# Altium PCB THEIA3000 LIGHTING BOARD V2.PcbDoc (part 1 of 2)
Units mil, origin at the board's own origin, x right, y up, seen from the top; angles counter-clockwise.
Board outline 10669.29 x 4271.65 mil, 2 copper layers (Top Layer, Bottom Layer); 147 components, 96 nets, 386 pads, 52 vias.
Unrouted connection lines stored in the file: 10.
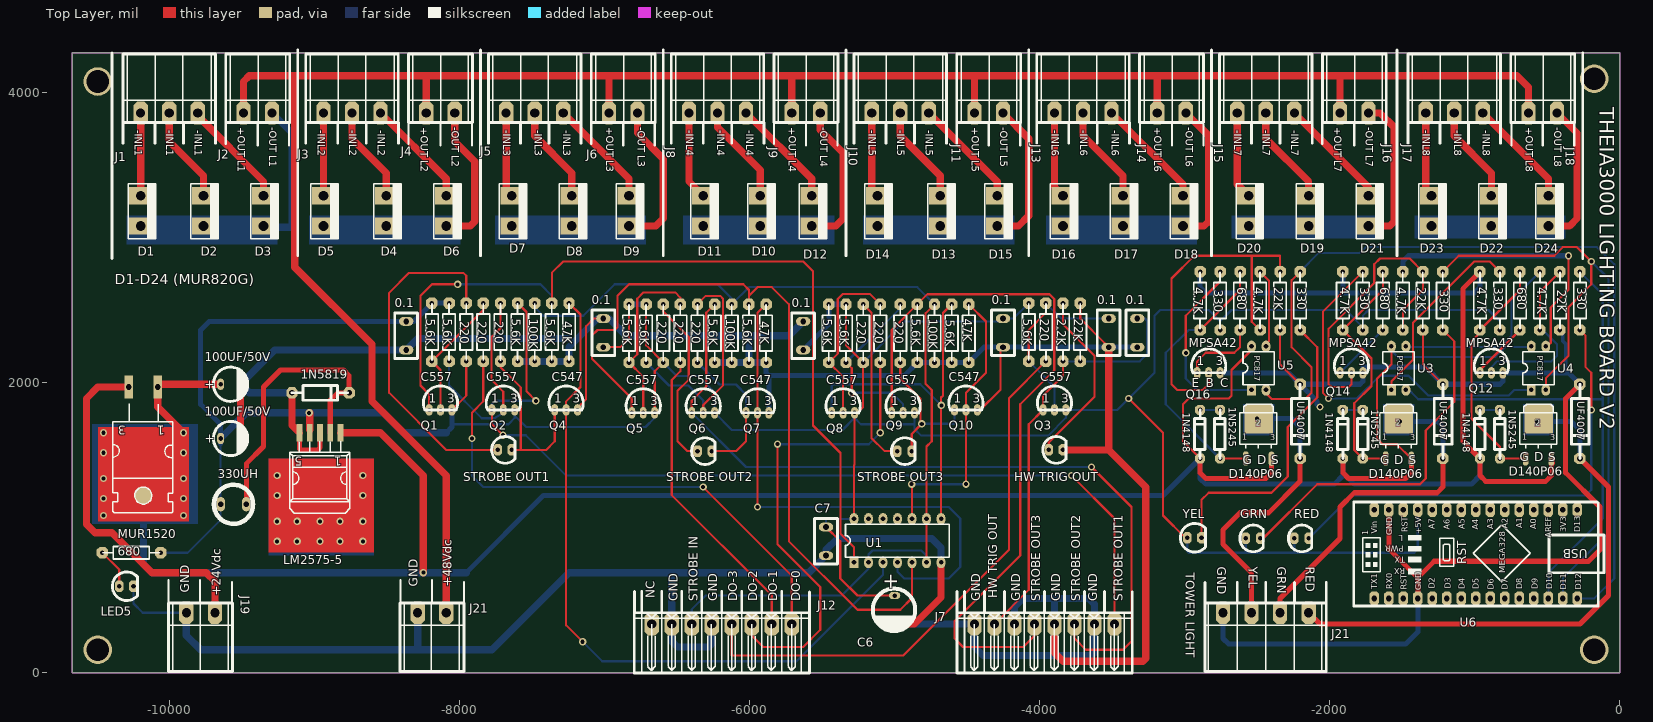
[diagram p0: Top Layer view]
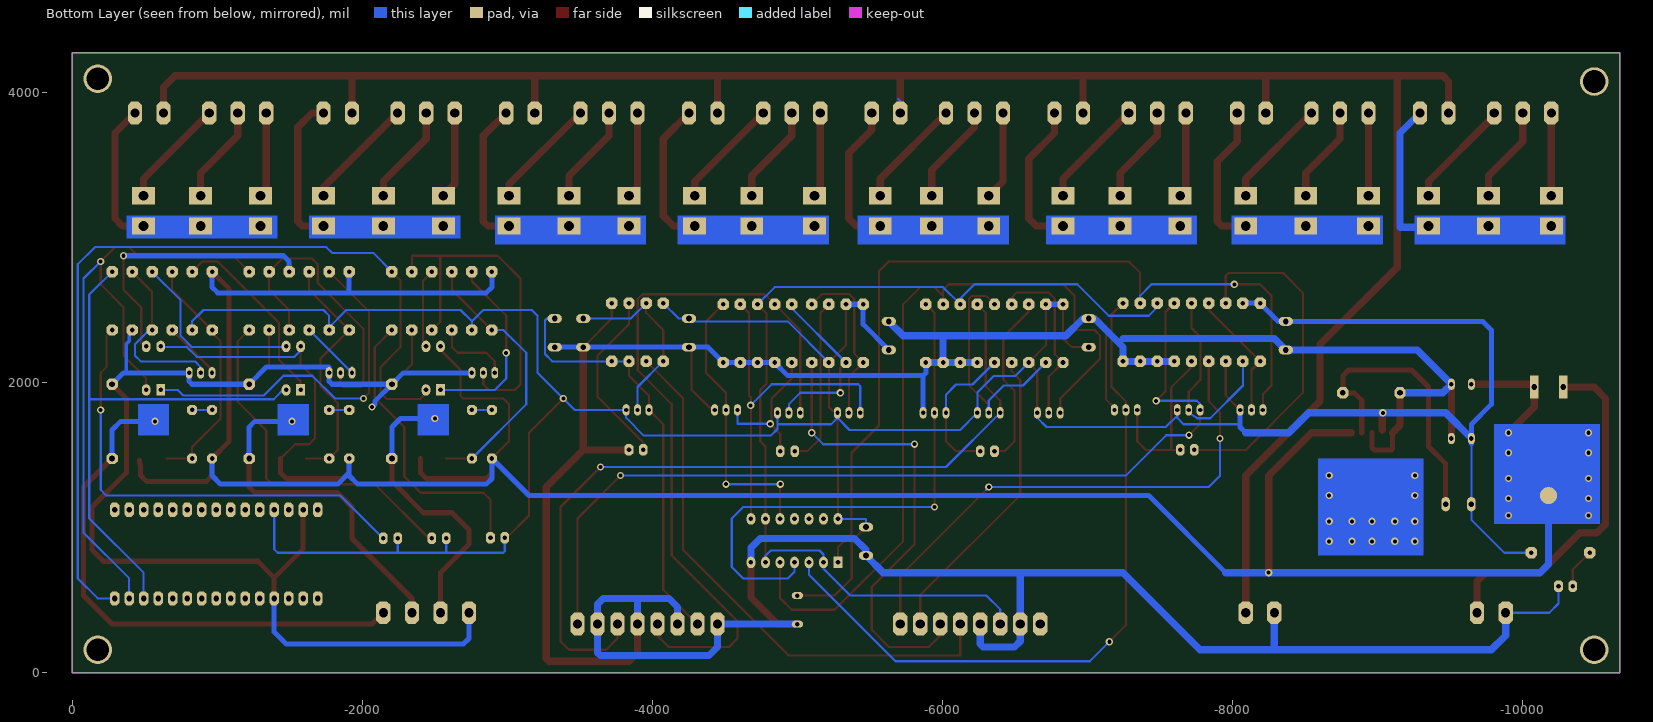
[diagram p1: Bottom Layer view, seen from below]

## Layer stack, top to bottom
Top Solder: solder mask 0.4, Solder Resist, Dk 3.5
Top Layer: signal copper 1.4
Dielectric 1: dielectric 12.6, FR-4, Dk 4.8
Bottom Layer: signal copper 1.4
Bottom Solder: solder mask 0.4, Solder Resist, Dk 3.5

## Board outline
-10669.29,0 -10669.29,4271.65 0,4271.65 0,0

## Design rules (kind name [scope] priority, off if disabled: settings)
Clearance [All] p1: gap=10
PolygonConnect [All] p1: connectstyle=Relief reliefconductorwidth=10 reliefentries=4 polygonreliefangle="90 Angle" airgapwidth=10
RoutingVias [All] p1: holewidth=28 width=50 viastyle="Through Hole" minholewidth=28 minwidth=50 maxholewidth=28 maxwidth=50
SolderMaskExpansion [All] p1: expansion=4
UnpouredPolygon [All] p1: allowunpoured=FALSE
Width [All] p1: maxlimit=70 minlimit=10 preferedwidth=15
29 further rules are at their usual default settings.

## Classes and differential pairs
component class "THIEA3000 LIGHTING BOARD V2-1": 0.1 1N5819 2.2K 5.6K 22K 47K 100K 100UF/50V 220 330UH 680 C1 C2 C3 C4 C5 C6 C7 C8 C9 C10 C557 D1 D2 D3 D4 D5 D6 D7 D8 D9 D10 D11 D12 D13 D14 D15 D16 D17 D18 D19 D20 D21 D22 D23 D24 "HW TRIG OUT" J1 J2 J3 J4 J5 J6 J7 J8 J9 J10 J11 J12 J13 J14 J15 J16 J17 J18 J19 J21 LED5 LM2575-5 MUR1520 Q1 Q2 Q3 Q4 Q5 Q6 Q7 Q8 Q9 Q10 R1 R2 R3 R4 R5 R6 R7 R8 R11 R12 R13 R14 R15 R16 R17 R18 R19 R20 R21 R22 R23 R24 R25 R26 R28 R29 R30 R31 R32 "STROBE OUT1" "STROBE OUT2" "STROBE OUT3" TIP22 U1
component class "THIEA3000 LIGHTING BOARD V2-2": 1N4148 1N5245 4.7K 22K 330 680 D27 D28 D29 D30 D140P06 GRN J21 Q11 Q12 Q13 Q14 Q15 Q16 R33 R34 R36 R37 R38 R39 R40 R41 R42 R44 R45 R46 RED U3 U4 U6 UF4007 YEL ZD1 ZD2

## Components (designator, comment, footprint, x,y, rotation, side; value= is the part's Value field where it differs from the comment)
0.1 "Cap" "CAP 5/8/Re" -8366.14,2224.41 r90 top (schematic designator C1)
0.1 "Cap" "CAP 5/8/Re" -4251.97,2244.09 r90 top (schematic designator C2)
0.1 "Cap" "CAP 5/8/Re" -3523.62,2244.09 r90 top (schematic designator C3)
0.1 "Cap" "CAP 5/8/Re" -3326.77,2244.09 r90 top (schematic designator C4)
0.1 "Cap" "CAP 5/8/Re" -7007.87,2244.09 r90 top (schematic designator C5)
0.1 "Cap" "CAP 5/8/Re" -5629.92,2224.41 r90 top (schematic designator C8)
1N4148 "1N4148" "DIODE 8.5" -964.57,1476.38 r90 top (schematic designator D27)
1N4148 "1N4148" "DIODE 8.5" -1909.45,1476.38 r90 top (schematic designator D29)
1N4148 "1N4148" "DIODE 8.5" -2893.7,1476.38 r90 top (schematic designator D31)
1N5245 "1N5245B (ZD15V)" "DIODE 8.5" -826.77,1476.38 r90 top (schematic designator ZD1)
1N5245 "1N5245B (ZD15V)" "DIODE 8.5" -1771.65,1476.38 r90 top (schematic designator ZD2)
1N5245 "1N5245B (ZD15V)" "DIODE 8.5" -2755.91,1476.38 r90 top (schematic designator ZD3)
1N5819 "1N5819" "DIODE 10.0" -9153.54,1929.13 r0 top (schematic designator D26)
2.2K "2.2K" "RES 1/4" -3838.58,2145.67 r90 top (schematic designator R9)
4.7K "22K" "RES 1/4" -964.57,2362.2 r90 top (schematic designator R33)
4.7K "22K" "RES 1/4" -551.18,2362.2 r90 top (schematic designator R36)
4.7K "22K" "RES 1/4" -1909.45,2362.2 r90 top (schematic designator R39)
4.7K "22K" "RES 1/4" -1496.06,2362.2 r90 top (schematic designator R42)
4.7K "22K" "RES 1/4" -2893.7,2362.2 r90 top (schematic designator R45)
4.7K "22K" "RES 1/4" -2480.31,2362.2 r90 top (schematic designator R48)
5.6K "22K" "RES 1/4" -8188.98,2145.67 r90 top (schematic designator R1)
5.6K "22K" "RES 1/4" -8070.87,2145.67 r90 top (schematic designator R2)
5.6K "22K" "RES 1/4" -7598.43,2145.67 r90 top (schematic designator R8)
5.6K "22K" "RES 1/4" -7362.2,2145.67 r90 top (schematic designator R12)
5.6K "22K" "RES 1/4" -6830.71,2137.8 r90 top (schematic designator R14)
5.6K "22K" "RES 1/4" -6712.64,2137.79 r90 top (schematic designator R15)
5.6K "22K" "RES 1/4" -6240.16,2137.8 r90 top (schematic designator R19)
5.6K "22K" "RES 1/4" -6003.94,2137.8 r90 top (schematic designator R21)
5.6K "22K" "RES 1/4" -5452.76,2137.8 r90 top (schematic designator R23)
5.6K "22K" "RES 1/4" -5334.65,2137.8 r90 top (schematic designator R24)
5.6K "22K" "RES 1/4" -4842.52,2137.8 r90 top (schematic designator R29)
5.6K "22K" "RES 1/4" -4606.3,2137.8 r90 top (schematic designator R31)
5.6K "22K" "RES 1/4" -4074.8,2145.67 r90 top (schematic designator R5)
22K "22K" "RES 1/4" -3720.47,2145.67 r90 top (schematic designator R10)
22K "22K" "RES 1/4" -413.39,2362.2 r90 top (schematic designator R37)
22K "22K" "RES 1/4" -1358.27,2362.2 r90 top (schematic designator R43)
22K "22K" "RES 1/4" -2342.52,2362.2 r90 top (schematic designator R49)
47K "22K" "RES 1/4" -7244.09,2145.67 r90 top (schematic designator R13)
47K "22K" "RES 1/4" -5885.83,2137.8 r90 top (schematic designator R22)
47K "22K" "RES 1/4" -4488.21,2137.79 r90 top (schematic designator R32)
100K "22K" "RES 1/4" -7480.31,2145.67 r90 top (schematic designator R11)
100K "22K" "RES 1/4" -6122.05,2137.8 r90 top (schematic designator R20)
100K "22K" "RES 1/4" -4724.41,2137.8 r90 top (schematic designator R30)
100UF/50V "100UF/50V" "E-CAP 3.5/11" -9645.67,1988.19 r0 top (schematic designator C10)
100UF/50V "100UF/50V" "E-CAP 3.5/11" -9645.67,1614.17 r0 top (schematic designator C9)
220 "220" "RES 1/4" -7834.65,2145.67 r90 top (schematic designator R4)
220 "220" "RES 1/4" -7952.76,2145.67 r90 top (schematic designator R3)
220 "22K" "RES 1/4" -7716.54,2145.67 r90 top (schematic designator R6)
220 "220" "RES 1/4" -6476.38,2137.8 r90 top (schematic designator R17)
220 "220" "RES 1/4" -6594.49,2137.8 r90 top (schematic designator R16)
220 "22K" "RES 1/4" -6358.27,2137.8 r90 top (schematic designator R18)
220 "220" "RES 1/4" -5098.43,2137.8 r90 top (schematic designator R26)
220 "220" "RES 1/4" -5216.54,2137.8 r90 top (schematic designator R25)
220 "22K" "RES 1/4" -4960.63,2137.8 r90 top (schematic designator R28)
220 "22K" "RES 1/4" -3956.69,2145.67 r90 top (schematic designator R7)
330 "22K" "RES 1/4" -826.77,2362.2 r90 top (schematic designator R34)
330 "22K" "RES 1/4" -275.59,2362.2 r90 top (schematic designator R38)
330 "22K" "RES 1/4" -1771.65,2362.2 r90 top (schematic designator R40)
330 "22K" "RES 1/4" -1220.47,2362.2 r90 top (schematic designator R44)
330 "22K" "RES 1/4" -2755.91,2362.2 r90 top (schematic designator R46)
330 "22K" "RES 1/4" -2204.72,2362.2 r90 top (schematic designator R50)
330UH "L1" "POWER L 4.5mm" -9645.67,1161.42 r0 top (schematic designator L1)
680 "22K" "RES 1/4" -10059.06,826.77 r180 top (schematic designator R27)
680 "680" "RES 1/4" -688.98,2362.2 r90 top (schematic designator R35)
680 "680" "RES 1/4" -1633.86,2362.2 r90 top (schematic designator R41)
680 "680" "RES 1/4" -2618.11,2362.2 r90 top (schematic designator R47)
C6 "100UF/50V" "E-CAP 5.0/11" -5000,531.5 r270 top
C7 "0.1" "CAP 5/8/Re" -5472.44,807.09 r90 top
D1 "MUR820G" TO-220(2) -10196.85,3287.4 r270 top
D2 "MUR820G" TO-220(2) -9763.78,3287.4 r270 top
D3 "MUR820G" TO-220(2) -9350.39,3287.4 r270 top
D4 "MUR820G" TO-220(2) -8503.94,3287.4 r270 top
D5 "MUR820G" TO-220(2) -8937.01,3287.4 r270 top
D6 "MUR820G" TO-220(2) -8090.55,3287.4 r270 top
D7 "MUR820G" TO-220(2) -7637.8,3287.4 r270 top
D8 "MUR820G" TO-220(2) -7224.41,3287.4 r270 top
D9 "MUR820G" TO-220(2) -6830.71,3287.4 r270 top
D10 "MUR820G" TO-220(2) -5925.2,3287.4 r270 top
D11 "MUR820G" TO-220(2) -6318.9,3287.4 r270 top
D12 "MUR820G" TO-220(2) -5570.87,3287.4 r270 top
D13 "MUR820G" TO-220(2) -4685.04,3287.4 r270 top
D14 "MUR820G" TO-220(2) -5118.11,3287.4 r270 top
D15 "MUR820G" TO-220(2) -4291.34,3287.4 r270 top
D16 "MUR820G" TO-220(2) -3838.58,3287.4 r270 top
D17 "MUR820G" TO-220(2) -3425.2,3287.4 r270 top
D18 "MUR820G" TO-220(2) -3011.81,3287.4 r270 top
D19 "MUR820G" TO-220(2) -2145.67,3287.4 r270 top
D20 "MUR820G" TO-220(2) -2559.06,3287.4 r270 top
D21 "MUR820G" TO-220(2) -1732.28,3287.4 r270 top
D22 "MUR820G" TO-220(2) -885.83,3287.4 r270 top
D23 "MUR820G" TO-220(2) -1299.21,3287.4 r270 top
D24 "MUR820G" TO-220(2) -492.13,3287.4 r270 top
D140P06 "RSD140P06 (TO-252)" TO-252-3 -649.61,1476.38 r0 top (schematic designator Q11)
D140P06 "RSD140P06 (TO-252)" TO-252-3 -1614.17,1476.38 r0 top (schematic designator Q13)
D140P06 "RSD140P06 (TO-252)" TO-252-3 -2578.74,1476.38 r0 top (schematic designator Q15)
GRN "LED-Y" "LED 3/2.54/R" -2578.74,925.2 r0 top (schematic designator LED7)
"HW TRIG OUT" "" "LED 3/2.54/R" -3937.01,1535.43 r0 top (schematic designator LED2)
J1 "IN L1" "Plug-in TERM 5.0/3P/R" -10196.85,3858.27 r0 top
J2 "OUT L1" "Plug-in TERM 5.0/2P/RH" -9488.19,3858.27 r0 top
J3 "IN L2" "Plug-in TERM 5.0/3P/R" -8937.01,3858.27 r0 top
J4 "OUT L2" "Plug-in TERM 5.0/2P/RH" -8228.35,3858.27 r0 top
J5 "IN L3" "Plug-in TERM 5.0/3P/R" -7677.17,3858.27 r0 top
J6 "OUT L3" "Plug-in TERM 5.0/2P/RH" -6968.5,3858.27 r0 top
J7 "Header 8" "Plug-in terminal block 8P/3.5/RA" -3484.25,334.65 r180 top
J8 "IN L4" "Plug-in TERM 5.0/3P/R" -6417.32,3858.27 r0 top
J9 "OUT L4" "Plug-in TERM 5.0/2P/RH" -5708.66,3858.27 r0 top
J10 "IN L5" "Plug-in TERM 5.0/3P/R" -5157.48,3858.27 r0 top
J11 "OUT L5" "Plug-in TERM 5.0/2P/RH" -4448.82,3858.27 r0 top
J12 "Header 8" "Plug-in terminal block 8P/3.5/RA" -5708.66,334.65 r180 top
J13 "IN L6" "Plug-in TERM 5.0/3P/R" -3897.64,3858.27 r0 top
J14 "OUT L6" "Plug-in TERM 5.0/2P/RH" -3188.98,3858.27 r0 top
J15 "IN L7" "Plug-in TERM 5.0/3P/R" -2637.8,3858.27 r0 top
J16 "OUT L7" "Plug-in TERM 5.0/2P/RH" -1929.13,3858.27 r0 top
J17 "IN L8" "Plug-in TERM 5.0/3P/R" -1338.58,3858.27 r0 top
J18 "OUT L8" "Plug-in TERM 5.0/2P/RH" -629.92,3858.27 r0 top
J19 "+24Vdc" "Plug-in TERM 5.0/2P/RH" -9685.04,413.39 r180 top
J21 "+48Vdc" "Plug-in TERM 5.0/2P/RH" -8090.55,413.39 r180 top
J21 "TOWER LIGHT" "Plug-in TERM 5.0/4P/R" -2145.67,413.39 r180 top
LED5 "PWR" "LED 5/2.54/R" -10275.59,590.55 r0 top
LM2575-5 "LM2575-xx" TO-263(U) -8818.9,1653.54 r180 top (schematic designator U2)
MUR1520 "MUR1520G" TO-220-2 -10078.74,1968.5 r180 top (schematic designator D25)
Q1 "PNP" TO-92 -8208.66,1811.02 r0 top
Q2 "PNP" TO-92 -7775.59,1811.02 r0 top
Q3 "PNP" TO-92 -3976.38,1811.02 r0 top
Q4 "BC547" TO-92 -7342.52,1811.02 r0 top
Q5 "PNP" TO-92 -6811.02,1791.34 r0 top
Q6 "PNP" TO-92 -6397.64,1791.34 r0 top
Q7 "BC547" TO-92 -6023.62,1791.34 r0 top
Q8 "PNP" TO-92 -5433.07,1791.34 r0 top
Q9 "PNP" TO-92 -5019.68,1791.34 r0 top
Q10 "BC547" TO-92 -4586.61,1811.02 r0 top
Q12 "MPSA42" TO-92 -964.57,2066.93 r0 top
Q14 "MPSA42" TO-92 -1929.13,2066.93 r0 top
Q16 "MPSA42" TO-92 -2913.39,2066.93 r0 top
RED "" "LED 3/2.54/R" -2244.09,925.2 r0 top (schematic designator LED6)
"STROBE OUT1" "" "LED 3/2.54/R" -7736.22,1535.43 r0 top (schematic designator LED1)
"STROBE OUT2" "" "LED 3/2.54/R" -6358.27,1527.56 r0 top (schematic designator LED3)
"STROBE OUT3" "" "LED 3/2.54/R" -4980.31,1527.56 r0 top (schematic designator LED4)
U1 "CD4081BE" DIP-14L -5275.59,767.72 r0 top
U3 "PC817" DIP-4L -1574.8,1948.82 r0 top
U4 "PC817" DIP-4L -610.24,1948.82 r0 top
U5 "PC817" DIP-4L -2539.37,1948.82 r0 top
U6 "ARDUINO NANO" "ARDUINO Nano" -1692.91,511.81 r90 top
UF4007 "UF4007" "diode 13.0" -275.59,1988.19 r270 top (schematic designator D28)
UF4007 "UF4007" "diode 13.0" -1220.47,1988.19 r270 top (schematic designator D30)
UF4007 "UF4007" "diode 13.0" -2204.72,1988.19 r270 top (schematic designator D32)
YEL "LED-G" "LED 5/2.54/R" -2913.39,925.2 r0 top (schematic designator LED8)

## Footprints (in the part's own frame and the unit in brackets; to place one, negate y for a bottom-side part, rotate by r counter-clockwise, add the part's x,y. Pads: shape width x height; smd on the part's side, far side on the other; paste and mask are expansions set on the pad)
"ARDUINO Nano" [mm] "Arduino Nano Promini-328"
  oct 2.5x1.7 hole 1: 1(0,-12.7) 2(0,-15.24) 3V3(15.5,-33.02) 9(0,-17.78) 10(0,-20.32) 11(0,-22.86) 12(0,-25.4) 13(0,-27.94) 14(0,-30.48) 15(0,-33.02) 16(0,-35.56) 17(15.5,-35.56) 19(15.5,-12.7) 21(15.5,-30.48) 22(15.5,-10.16) 23(15.5,-27.94) 24(15.5,-25.4) 25(15.5,-22.86) 26(15.5,-20.32) 27(15.5,-17.78) 28(15.5,-15.24) 29(0,-5.08) 29(15.5,-5.08) 30(0,-2.54) 31(0,0) 32(0,-10.16) +5V(15.5,-7.62) GND(0,-7.62) GND(15.5,-2.54) Vin(15.5,0)
  silkscreen extent -1.3,-40.2 16.9,3.6
"CAP 5/8/Re" [mm] "Metallized Polyester Film Cap"
  oval 1.524x2.5 hole 1: 1(0,0) 2(5,0)
  silkscreen extent -1.5,-2 6.5,2
"DIODE 8.5" [mm]
  oct 1.8x1.8 hole 0.8: 1(0,0) 2(8.5,0)
  silkscreen extent 0,-0.88 8.5,0.95
"DIODE 10.0" [mm]
  oct 2x2 hole 1: 1(0,0) 2(10,0)
  silkscreen extent 0,-1.3 9.7,1.28
"diode 13.0" [mm] "Silicon Rectifiers Diode 1000V/1A"
  oct 2x2 hole 1: 1(0,0) 2(13,0)
  silkscreen extent 0,-1.5 13,1.6
DIP-4L [mm]
  rect 1.524x2 hole 0.8: 1(0,0)
  oval 1.524x2 hole 0.8: 2(2.54,0) 3(2.54,7.62) 4(0,7.62)
  silkscreen extent -1.5,0.92 4,6.68
DIP-14L [mm]
  rect 1.524x2 hole 0.8: 1(-0.1,-0.2)
  oval 1.524x2 hole 0.8: 2(2.44,-0.2) 3(4.98,-0.2) 4(7.52,-0.2) 5(10.06,-0.2) 6(12.6,-0.2) 7(15.14,-0.2) 8(15.14,7.42) 9(12.6,7.42) 10(10.06,7.42) 11(7.52,7.42) 12(4.98,7.42) 13(2.44,7.42) 14(-0.1,7.42)
  silkscreen extent -1.6,0.72 16.6,6.47
"E-CAP 3.5/11" [mm] "E-Cap 2.5mm/11mm"
  oval 1.2x2 hole 0.8: 1(0,0) 2(3.5,0)
  silkscreen extent -1.25,-3 4.75,3
"E-CAP 5.0/11" [mm]
  oval 1.2x2 hole 0.8: 1(0,0) 2(5,0)
  silkscreen extent -1.2,-3.8 6.2,3.6
"LED 3/2.54/R" [mm] "LED 3mm"
  oct 1.5x2 hole 0.8: A(0,0) K(2.5,0)
  silkscreen extent -1.04,-2.34 3.06,2.34
"LED 5/2.54/R" [mm] "LED 5mm"
  oct 1.5x2 hole 0.8: A(-1.75,0.125) K(0.75,0.125)
  silkscreen extent -2.95,-2.37 1.48,2.62
"Plug-in TERM 5.0/2P/RH" [mm]
  oct 2.5x4 hole 1.6: 1(0,0) 2(5,0)
  silkscreen extent -3.1,-1.7 8.1,10.3
"Plug-in TERM 5.0/3P/R" [mm]
  oct 2.5x4 hole 1.6: 1(0,0) 2(5,0) 3(10,0)
  silkscreen extent -3.1,-5.3 13.13,10.3
"Plug-in TERM 5.0/4P/R" [mm]
  oct 2.5x4 hole 1.6: 1(0,0) 2(5,0) 3(10,0) 4(15,0)
  silkscreen extent -3.1,-5.3 18.13,10.32
"Plug-in terminal block 8P/3.5/RA" [mm]
  oct 2.5x4 hole 1.6: 1(0,0) 2(3.5,0) 3(7,0) 4(10.5,0) 5(14,0) 6(17.5,0) 7(21,0) 8(24.5,0)
  silkscreen extent -3.12,-5.7 27.58,8.6
"POWER L 4.5mm" [mm] "Pin to Pin 4.5mm"
  oval 1.524x2.5 hole 1: 1(0,0) 2(4.5,0)
  silkscreen extent -1.16,-3.44 5.68,3.39
"RES 1/4" [mm]
  oct 2x2 hole 0.8: 1(0,0) 2(10.2,0)
  silkscreen extent 0.2,-1.1 10.1,1.1
TO-92 [mm]
  oval 1.2x2 hole 0.762: 1(0,0) 2(2,0) 3(4,0)
  silkscreen extent -1,-0.03 5,4.2
TO-220(2) [mm]
  rect 3x4 hole 1.7 paste+0: 1(0,0)
  rect 3x4 hole 1.7: 3(5.3,0)
  silkscreen extent -2.1,-2.2 7.5,2.7
TO-220-2 [mm]
  rect 1.5x4 hole 1: 1(0,0) 3(5.1,0)
  round 3 all layers, no hole: 4(2.5,19)
  silkscreen extent -2.65,2.95 7.85,22
TO-252-3 [mm]
  oval 1x2.5 smd: 1(0,0) 3(4.5,-0.05)
  rect 5x5 smd: 2(2.275,6.9)
  silkscreen extent -1.05,1.75 5.45,9.53
TO-263(U) [mm]
  rect 1x3 smd: 1(0,0) 2(1.8,0) 3(3.6,0) 4(5.4,0) 5(7.2,0)
  silkscreen extent -1.6,1.5 8.9,14.05

## Part data
0.1 0.1 0.1 0.1 0.1 0.1: "0198-0033-8"
1N4148 1N4148 1N4148: library part DIODE, "Diode"
1N5245 1N5245 1N5245: library part DIODE, "0135-0081-3"
1N5819: library part "Diode 1N914"
2.2K 4.7K 4.7K 4.7K 4.7K 4.7K 4.7K 5.6K 5.6K 5.6K 5.6K 5.6K 5.6K 5.6K 5.6K 5.6K 5.6K 5.6K 5.6K 5.6K 22K 22K 22K 22K 47K 47K 47K 100K 100K 100K 220 220 220 220 220 220 220 220 220 220 330 330 330 330 330 330 680 680 680 680: library part RES1
100UF/50V 100UF/50V C6: library part ELECTRO1, "0566-0322-1"
330UH: library part COIL, "0638-0010-8"
C7: library part Cap, "0198-0033-8"
D1 D2 D3 D4 D5 D6 D7 D8 D9 D10 D11 D12 D13 D14 D15 D16 D17 D18 D19 D20 D21 D22 D23 D24: library part "MUR DIODE", "0235-0229-2"
D140P06 D140P06 D140P06: library part MOSFET-P1, "0176-0392-4"
GRN: "0686-0022-4"
"HW TRIG OUT": library part LED-R
J1 J3 J5 J8 J10 J13 J15 J17: library part "Header 3", "0005-0011-2"
J2 J4 J6 J9 J11 J14 J16 J18 J19 J21: library part CON2, "0005-0010-9"
J7 J12: "0330-0177-5"
J21: library part CON4, "0005-0012-5"
LED5 RED: library part LED-R, "0302-0042-3"
MUR1520: library part "MUR DIODE", "0235-0204-9"
Q1 Q2 Q3 Q5 Q6 Q8 Q9: "0136-0166-2"
Q4 Q7 Q10: library part NPN, "NPN Bipolar Transistor"
Q12 Q14 Q16: library part NPN, "0123-0670-5"
"STROBE OUT1" "STROBE OUT2" "STROBE OUT3": library part LED-R, "0010-0049-1"
U1: "0086-0196-5"
U3 U4 U5: library part "OPTO TRANSISTOR"
UF4007 UF4007 UF4007: library part DIODE, "0029-0179-1"
YEL: "0302-0001-4"

## Free pads (board coordinates)
  round 196.85 hole 157.48: 1(-10492.13,157.48) 1(-10492.13,4074.8) 1(-177.17,157.48) 1(-177.17,4094.49)

## Via types
v1: diameter 50, hole 28, Top Layer to Bottom Layer, 52 vias

## Nets (pads, with @x,y where several pads share a name; then routed paths per layer and width w, separated by ;. In a path a pad name is that pad's centre, name@x,y a point inside that pad or via, vN(x,y) a via of type N, cw(c..) or ccw(c..) an arc to the next point about the centre after c; other vN are vias at no path point)
+5V: 0.1.1@-5629.92,2224.41 0.1.1@-7007.87,2244.1 0.1.2@-4251.97,2440.95 0.1.2@-8366.14,2421.26 5.6K.2@-4074.8,2547.24 5.6K.2@-5334.65,2539.37 5.6K.2@-5452.76,2539.37 5.6K.2@-6712.64,2539.37 5.6K.2@-6830.71,2539.37 5.6K.2@-8070.87,2547.24 5.6K.2@-8188.98,2547.24 100UF/50V.1@-9645.67,1614.17 220.1@-5216.54,2137.8 220.1@-6594.49,2137.8 220.1@-7952.76,2145.67 330.1@-826.77,2362.2 330.1@-1771.65,2362.2 330.1@-2755.91,2362.2 330UH.1 680.1@-10059.06,826.77 C6.1 C7.2 GRN.A LM2575-5.4 Q1.3 Q2.3 Q3.3 Q5.3 Q6.3 Q8.3 Q9.3 RED.A U1.14 U6.+5V YEL.A | length 24021.9
  Top Layer w15: LM2575-5.4@-9031.5,1653.54 LM2575-5.4@-9031.5,1673.23 ; Q1.3@-8051.18,1811.02 -7952.76,1909.45 220.1@-7952.76,2145.67 ; 0.1.1@-7007.87,2244.1 -6889.76,2244.1 -6830.71,2303.15 5.6K.2@-6830.71,2539.37 ; 5.6K.2@-6712.64,2539.37 -6712.64,2255.95 220.1@-6594.49,2137.8 -6653.54,2078.74 Q5.3@-6653.54,1803.15 ; C7.2@-5472.44,1003.94 -5374.02,905.51 -5374.02,649.61 -5255.9,531.5 C6.1@-5000,531.5 ; 5.6K.2@-5334.65,2539.37 -5334.65,2255.91 220.1@-5216.54,2137.8 -5216.54,1830.71 -5244.09,1803.15 -5275.59,1803.15 -5275.59,1433 -5279.53,1429.06 U1.14@-5279.53,1059.84 ; v1(-3385.83,1889.76) -3149.61,1653.54 -3149.61,1082.68 -2997.05,930.12 YEL.A@-2982.28,930.12
  Top Layer w50: LM2575-5.4@-9031.5,1673.23 v1@-9031.5,1791.34
  Bottom Layer w15: 680.1@-10059.06,826.77 -9872.83,826.77 -9645.67,1053.94 330UH.1@-9645.67,1161.42 -9645.67,1573.19 ; -8051.18,1712.6 -7661.57,1712.6 -7618.11,1756.06 Q2.3@-7618.11,1795.06 ; Q2.3@-7618.11,1811.02 Q2.3@-7618.11,1795.06 ; Q5.3@-6653.54,1803.15 -6653.54,1756.06 -6716.69,1692.91 -7539.37,1692.91 -7618.11,1771.65 Q2.3@-7618.11,1795.06 ; 220.1@-6594.49,2137.8 -6501.76,2045.06 -6354.16,2045.06 -6240.16,1931.06 Q6.3@-6240.16,1791.34 -6122.05,1673.23 -5358.43,1673.23 Q8.3@-5275.59,1756.06 ; C7.2@-5472.44,1003.94 -5472.44,1059.84 U1.14@-5279.53,1059.84 ; Q8.3@-5275.59,1803.15 Q8.3@-5275.59,1756.06 ; 220.1@-5216.54,2137.8 -4933.07,2421.26 -4271.65,2421.26 0.1.2@-4251.97,2440.95 -4181.1,2440.95 5.6K.2@-4074.8,2547.24 ; -4862.2,1712.6 Q9.3@-4862.21,1803.15 ; YEL.A@-2982.28,930.12 -2982.28,836.61 -2972.44,826.77 -2578.74,826.77 ; 330.1@-2755.91,2362.2 -2755.91,2421.26 ; GRN.A@-2578.74,925.2 -2578.74,826.77 ; RED.A@-2244.09,925.2 -2244.09,826.77 ; 330.1@-1771.65,2362.2 330.1@-1771.65,2381.89 ; U6.+5V@-1392.91,1122.05 -1392.91,851.18 -1417.32,826.77 -2244.09,826.77 ; 330.1@-826.77,2362.2 -826.77,2421.26 -905.51,2500 -1732.28,2500 -1771.65,2460.63 330.1@-1771.65,2381.89 ; Q8.3@-5275.59,1756.06 -5232.13,1712.6 -4867.57,1712.6 -4862.21,1707.24 -4862.21,1679.43 -4816.64,1633.86 -3941.1,1633.86 -3818.9,1756.06 Q3.3@-3818.9,1811.02 -3464.57,1811.02 v1(-3385.83,1889.76) -3208.66,2066.93 -3208.66,2460.63 -3169.29,2500 -2834.65,2500 -2755.91,2421.26 ; -2755.91,2421.26 -2677.17,2500 -1889.76,2500 330.1@-1771.65,2381.89 ; -2578.74,826.77 -2244.09,826.77
  Bottom Layer w35: -9645.67,1574.8 100UF/50V.1@-9645.67,1614.17 -9645.67,1712.6 -9783.46,1850.39 -9783.46,2362.2 -9724.41,2421.26 0.1.2@-8366.14,2421.26 -8314.96,2421.26 5.6K.2@-8188.98,2547.24 5.6K.2@-8070.87,2547.24 ; -8090.55,1653.54 -8051.18,1692.91 -8051.18,1712.6 ; -8051.18,1729.06 Q1.3@-8051.18,1811.02 ; 5.6K.2@-6830.71,2539.37 5.6K.2@-6712.64,2539.37 ; 0.1.1@-5629.92,2224.41 -5452.76,2401.58 5.6K.2@-5452.76,2539.37 5.6K.2@-5334.65,2539.37
  Bottom Layer w50: 100UF/50V.1@-9645.67,1614.17 -9468.5,1791.34 -8523.62,1791.34 -8385.83,1653.54 -8090.55,1653.54
  other v1: -9035.43,1791.34
+24V: 1N4148.1 4.7K.2@-964.57,2763.78 4.7K.2@-1909.45,2763.78 4.7K.2@-2893.7,2763.78 100UF/50V.1@-9645.67,1988.19 D140P06.3 LM2575-5.1 MUR1520.1 MUR1520.4 U3.4 U4.4 U5.4 | length 22753.2
  Top Layer w15: v1(-9901.57,1082.68) v1(-9901.57,1200.79) v1(-9901.57,1338.58) v1(-9901.57,1515.75) v1(-9901.57,1653.54) ; 1N4148.1@-2893.7,1476.38 -3011.81,1594.49 -3011.81,1850.39 -2972.44,1889.76 -2696.85,1889.76 -2677.17,1909.45 -2677.17,2086.61 -2539.37,2224.41 U5.4@-2539.37,2248.82 U5.4@-2539.37,2268.5 ; U3.4@-1574.8,2248.82 -1574.8,2125.98 -1673.23,2027.56 -1673.23,1614.17 -1633.86,1574.8 -1537.4,1574.8 D140P06.3@-1437.01,1474.41
  Top Layer w35: 1N4148.1@-2893.7,1476.38 -2893.7,1377.95 -2854.33,1338.58 -2440.94,1338.58 -2401.58,1377.95 D140P06.3@-2401.58,1474.41 ; 1N4148.1@-1909.45,1476.38 -1909.45,1377.95 -1870.08,1338.58 -1476.38,1338.58 -1437.01,1377.95 D140P06.3@-1437.01,1474.41 ; 4.7K.2@-964.57,2763.78 -1082.68,2645.67 -1082.68,1594.49 1N4148.1@-964.57,1476.38 -964.57,1358.27 -925.2,1318.9 -511.81,1318.9 -472.44,1358.27 -472.44,1437.01 -463.58,1445.87 D140P06.3@-463.58,1465.55
  Top Layer w50: v1(-9901.57,1653.54) -10078.74,1830.71 MUR1520.1@-10078.74,1968.5 -10059.05,1988.19 100UF/50V.1@-9645.67,1988.19 ; LM2575-5.1@-8818.9,1653.54 -8543.31,1653.54 -8248.03,1358.27 v1(-8248.03,688.98)
  Bottom Layer w15: v1@-10472.44,1082.68 v1(-10452.76,1082.68) ; MUR1520.4@-10177.17,1220.47 -10039.37,1082.68 v1(-9901.57,1082.68) ; U3.4@-1574.8,2268.5 -1574.8,2218.23 -1533.54,2176.97 -858.54,2176.97 -791.42,2244.09 -610.24,2244.09 U4.4@-610.24,2268.5
  Bottom Layer w35: -7952.76,688.98 -7421.26,1220.47 -3149.61,1220.47 1N4148.1@-2893.7,1476.38 -2893.7,1338.58 -2854.33,1299.21 -1968.5,1299.21 -1909.45,1358.27 -1909.45,1377.95 ; 4.7K.2@-2893.7,2763.78 -2893.7,2657.48 -2854.33,2618.11 -1909.45,2618.11 ; 1N4148.1@-1909.45,1476.38 -1909.45,1377.95 ; 4.7K.2@-1909.45,2763.78 -1909.45,2618.11 ; 1N4148.1@-964.57,1476.38 -964.57,1358.27 -1023.62,1299.21 -1830.71,1299.21 -1909.45,1377.95 ; 4.7K.2@-964.57,2763.78 -964.57,2657.48 -1003.94,2618.11 -1909.45,2618.11
  Bottom Layer w50: MUR1520.4@-10177.17,1220.47 -10177.17,748.03 -10118.11,688.98 -7952.76,688.98
  other v1: -10452.76,1200.79 -10452.76,1338.58 -10452.76,1515.75 -10452.76,1653.54
+48V: J2.1 J4.1 J6.1 J9.1 J11.1 J14.1 J16.1 J18.1 J21.1@-8090.55,413.39 | length 15196.8
  Top Layer w50: J2.1@-9488.19,3858.27 -9488.19,4074.8 -9448.82,4114.17 -8228.35,4114.17 ; -9133.86,4114.17 -9133.86,2795.28 -8602.36,2263.78 -8602.36,1870.08 -8090.55,1358.27 -8090.55,748.03 ; J4.1@-8228.35,3858.27 -8228.35,4114.17 ; J21.1@-8090.55,413.39 -8090.55,767.72 ; J6.1@-6968.5,3858.27 -6968.5,4114.17 ; J9.1@-5708.66,3858.27 -5708.66,4114.17 ; J11.1@-4448.82,3858.27 -4448.82,4114.17 ; J14.1@-3188.98,3858.27 -3188.98,4114.17 ; J16.1@-1929.13,3858.27 -1929.13,4114.17 ; J18.1@-629.92,3858.27 -629.92,4035.43 -708.66,4114.17 -1929.13,4114.17 ; -8228.35,4114.17 -6968.5,4114.17 ; -6968.5,4114.17 -5708.66,4114.17 ; -5708.66,4114.17 -4448.82,4114.17 ; -4448.82,4114.17 -3188.98,4114.17 ; -3188.98,4114.17 -1929.13,4114.17
  Bottom Layer w15: J2.1@-9488.19,3829.06 J2.1@-9488.19,3858.27 ; J4.1@-8228.35,3829.06 J4.1@-8228.35,3858.27 ; J6.1@-6968.5,3829.06 J6.1@-6968.5,3858.27 ; -5708.66,3939.95 -5693.54,3955.06 ; J11.1@-4448.82,3858.06 J11.1@-4448.82,3858.27 ; J14.1@-3188.98,3829.06 J14.1@-3188.98,3858.27 ; J16.1@-1929.13,3818.06 J16.1@-1929.13,3858.27 ; J18.1@-629.92,3829.06 J18.1@-629.92,3858.27
GND: 0.1.1@-3326.77,2244.1 0.1.1@-3523.62,2244.1 0.1.1@-4251.97,2244.1 0.1.1@-8366.14,2224.41 0.1.2@-5629.92,2421.26 0.1.2@-7007.87,2440.95 1N5819.1 5.6K.1@-4606.3,2137.8 5.6K.1@-4842.52,2137.8 5.6K.1@-6003.94,2137.8 5.6K.1@-6240.16,2137.8 5.6K.1@-7362.21,2145.67 5.6K.1@-7598.43,2145.67 22K.2@-3720.47,2547.24 47K.1 100K.1 100UF/50V.2 "HW TRIG OUT.K" C6.2 C7.1 J7.2 J7.4 J7.6 J7.8 J12.5 J12.7 J19.2 J21.2@-8287.4,413.39 LED5.K LM2575-5.3 LM2575-5.5 Q4.3 Q7.3 Q10.3 U1.7 | length 25648.2
  Top Layer w15: Q4.3@-7185.04,1811.02 -7185.04,1826.06 -7125.98,1885.12 -7125.98,2388.62 -7073.66,2440.95 0.1.2@-7007.87,2440.95 ; Q10.3@-4429.13,1803.15 -4417.32,1803.15 -4269.54,1950.93 -4269.54,2244.1 0.1.1@-4251.97,2244.1 ; 22K.2@-3720.47,2547.24 -3720.47,2440.95 -3546.54,2267.02 -3546.54,2244.1 0.1.1@-3523.62,2244.1
  Top Layer w35: LM2575-5.5@-9102.36,1653.54 -9102.36,1543.31 -9094.49,1535.43 -8976.38,1535.43 -8960.63,1551.18 LM2575-5.3@-8960.63,1653.54
  Top Layer w50: 100UF/50V.2@-9507.87,1614.17 100UF/50V.2@-9507.87,1988.19 ; 1N5819.1@-9153.54,1929.13 -9153.54,1704.73 LM2575-5.5@-9102.36,1653.54 ; C6.2@-5000,334.65 -4862.2,334.65 -4679.53,517.32 U1.7@-4679.53,759.84 ; J7.4@-3897.64,334.65 -3897.64,137.8 -3838.58,78.74 -3287.4,78.74 -3267.72,98.43 -3267.72,1279.53 -3523.62,1535.43 ; -3838.58,1535.43 -3523.62,1535.43 ; 0.1.1@-3523.62,2244.1 -3523.62,1535.43
  Bottom Layer w15: LED5.K@-10246.06,595.47 -10246.06,476.06 -10183.06,413.06 J19.2@-9881.89,413.06 ; -6535.43,249.95 J12.7@-6535.43,334.65 ; -6259.84,251.76 J12.5@-6259.84,334.65 ; -5885.83,2066.93 -5866.14,2047.24
  Bottom Layer w35: 47K.1@-5885.83,2137.8 -5885.83,2066.93 -5866.14,2047.24 ; Q7.3@-5866.14,1803.15 -5866.14,2047.24 ; 0.1.1@-3326.77,2244.1 0.1.1@-3523.62,2244.1 0.1.1@-4251.97,2244.1 -4381.91,2244.1 47K.1@-4488.21,2137.79 5.6K.1@-4606.3,2137.8 100K.1@-4724.41,2137.8 5.6K.1@-4842.52,2137.8 -4933.07,2047.24 -5866.14,2047.24
  Bottom Layer w50: J19.2@-9881.89,413.39 -9881.89,413.06 -9881.89,255.9 -9783.46,157.48 -7775.59,157.48 -7244.09,688.98 -6535.43,688.98 ; 1N5819.1@-9153.54,1929.13 -9448.82,1929.13 100UF/50V.2@-9507.87,1988.19 -9271.65,2224.41 0.1.1@-8366.14,2224.41 -8287.4,2303.15 -7244.1,2303.15 ; -8287.4,157.48 J21.2@-8287.4,413.39 ; 5.6K.1@-7598.43,2145.67 100K.1@-7480.32,2145.67 5.6K.1@-7362.21,2145.67 47K.1@-7244.1,2145.67 -7244.1,2244.09 -7047.24,2440.95 0.1.2@-7007.87,2440.95 -6968.5,2440.95 -6850.39,2322.83 -6003.94,2322.83 ; -6535.43,249.95 -6535.43,216.54 -6496.06,177.17 -6279.53,177.17 -6259.84,196.85 -6259.84,251.76 ; J12.7@-6535.43,334.65 -6535.43,688.98 ; 5.6K.1@-6240.16,2137.8 100K.1@-6122.05,2137.8 5.6K.1@-6003.94,2137.8 ; 47K.1@-5885.83,2137.8 5.6K.1@-6003.94,2137.8 ; 0.1.2@-5629.92,2421.26 -5728.35,2322.83 -6003.94,2322.83 ; C6.2@-5000,334.65 J7.8@-4448.82,334.65 -4448.82,177.16 -4389.76,118.11 -3641.73,118.11 -3622.05,137.8 J7.2@-3622.05,334.65 -3622.05,472.44 -3661.42,511.81 -4114.17,511.81 -4173.23,452.76 J7.6@-4173.23,334.65 ; U1.7@-4679.53,759.84 -4679.53,860.63 -4744.09,925.2 -5393.7,925.2 -5472.44,846.46 C7.1@-5472.44,807.09 -5590.55,688.98 -6535.43,688.98 ; J7.4@-3897.64,334.65 -3897.64,511.81 ; 5.6K.1@-6003.94,2137.8 -6003.94,2322.83
GND1: 22K.1@-413.39,2362.2 22K.1@-1358.27,2362.2 22K.1@-2342.52,2362.2 J21.4 Q12.3 Q14.3 Q16.3 U6.GND UF4007.1 | length 9711.9
  Top Layer w15: 22K.1@-2342.52,2362.2 -2342.52,2125.98 UF4007.1@-2204.72,1988.19 ; 22K.1@-1358.27,2362.2 -1358.27,2125.98 UF4007.1@-1220.47,1988.19
  Top Layer w35: U6.GND@-1592.91,1122.05 -1592.91,854.33 -1392.91,654.33 ; U6.GND@-1392.91,511.81 -1392.91,654.33 ; UF4007.1@-275.59,1988.19 -374.02,1889.76 -374.02,1377.95 -137.8,1141.73 -137.8,846.46 -216.54,767.72 -1279.53,767.72 -1392.91,654.33
  Bottom Layer w15: Q14.3@-1771.65,2065.97 Q14.3@-1771.65,2066.93 ; Q12.3@-807.09,2065.97 -353.37,2065.97
  Bottom Layer w25: 22K.1@-413.39,2362.2 -393.7,2342.52 -393.7,2285.58 -374.02,2265.89 -374.02,2076.28
  Bottom Layer w35: Q16.3@-2755.91,2066.93 -2283.46,2066.93 UF4007.1@-2204.72,1988.19 ; J21.4@-2736.22,413.39 -2736.22,236.22 -2696.85,196.85 -1476.38,196.85 -1392.91,280.32 U6.GND@-1392.91,511.81 ; v1(-2066.93,1830.71) -2086.61,1850.39 -2086.61,1870.08 UF4007.1@-2204.72,1988.19 ; Q14.3@-1771.65,2065.97 -1771.65,2007.87 -1791.34,1988.19 UF4007.1@-2204.72,1988.19 ; Q14.3@-1771.65,2066.93 -1771.65,2106.3 -1338.58,2106.3 UF4007.1@-1220.47,1988.19 -826.77,1988.19 -807.09,2007.87 -807.09,2065.97 Q12.3@-807.09,2066.93 -354.33,2066.93 -353.37,2065.97 UF4007.1@-275.59,1988.19
NetC3_2: 0.1.2@-3523.62,2440.95 5.6K.1@-4074.8,2145.67 220.2@-3956.69,2547.24 Q3.2 | length 1335.6
  Top Layer w15: 5.6K.1@-4074.8,2145.67 -4074.8,2362.2 -3956.69,2480.31 220.2@-3956.69,2547.24
  Bottom Layer w15: 5.6K.1@-4074.8,2145.67 -3897.64,1968.5 Q3.2@-3897.64,1811.02 ; 220.2@-3956.69,2547.24 -3850.4,2440.95 0.1.2@-3523.62,2440.95
NetC4_2: 0.1.2@-3326.77,2440.95 2.2K.1 22K.1@-3720.47,2145.67 J7.7 Q3.1 | length 2910.5
  Top Layer w15: J7.7@-4311.02,334.65 -4074.8,570.87 -4074.8,1712.6 Q3.1@-3976.38,1811.02 -3976.38,1909.45 -3838.58,2047.24 2.2K.1@-3838.58,2145.67
  Bottom Layer w15: 2.2K.1@-3838.58,2145.67 22K.1@-3720.47,2145.67 -3309.94,2145.67 -3259.54,2196.06 -3259.54,2426.95 -3273.54,2440.95 0.1.2@-3326.77,2440.95
NetD1_1: D1.1 J1.1 | length 570.9
  Top Layer w50: D1.1@-10196.85,3287.4 J1.1@-10196.85,3858.27
NetD1_3: D1.3 D2.3 D3.3 J2.2 | length 1891
  Bottom Layer w15: D1.3@-10196.85,3078.74 D3.3@-9350.39,3078.74
  Bottom Layer w50: D3.3@-9350.39,3078.74 -9342.52,3070.87 -9153.54,3070.87 -9153.54,3720.47 J2.2@-9291.34,3858.27
NetD2_1: D2.1 J1.2 | length 668.7
  Top Layer w50: J1.2@-10000,3858.27 -10000,3661.42 -9763.78,3425.2 D2.1@-9763.78,3287.4
NetD3_1: D3.1 J1.3 | length 758.4
  Top Layer w50: J1.3@-9803.15,3858.27 -9803.15,3838.58 -9350.39,3385.83 D3.1@-9350.39,3287.4
NetD4_1: D4.1 J3.2 | length 668.7
  Top Layer w50: J3.2@-8740.16,3858.27 -8740.16,3681.1 -8503.94,3444.88 D4.1@-8503.94,3287.4
NetD4_3: D4.3 D5.3 D6.3 J4.2 | length 1015
  Top Layer w50: D6.3@-8090.55,3078.74 -7925.2,3078.74 -7893.7,3110.24 -7893.7,3523.62 -8031.5,3661.42 J4.2@-8031.5,3858.27
NetD5_1: D5.1 J3.1 | length 570.9
  Top Layer w50: D5.1@-8937.01,3287.4 J3.1@-8937.01,3858.27
NetD6_1: D6.1 J3.3 | length 758.4
  Top Layer w50: J3.3@-8543.31,3858.27 -8090.55,3405.51 D6.1@-8090.55,3287.4
NetD7_1: D7.1 J5.1 | length 587.2
  Top Layer w50: J5.1@-7677.17,3858.27 -7677.17,3326.77 D7.1@-7637.8,3287.4